# Altium PCB 遥控.PCBDOC (part 2 of 2)
Units mm, origin at the board's own origin, x right, y up, seen from the top; angles counter-clockwise.
Board outline 70.36 x 87.5 mm, 2 copper layers (Top Layer, Bottom Layer); 32 components, 37 nets, 115 pads, 57 vias.
Unrouted connection lines stored in the file: 5.
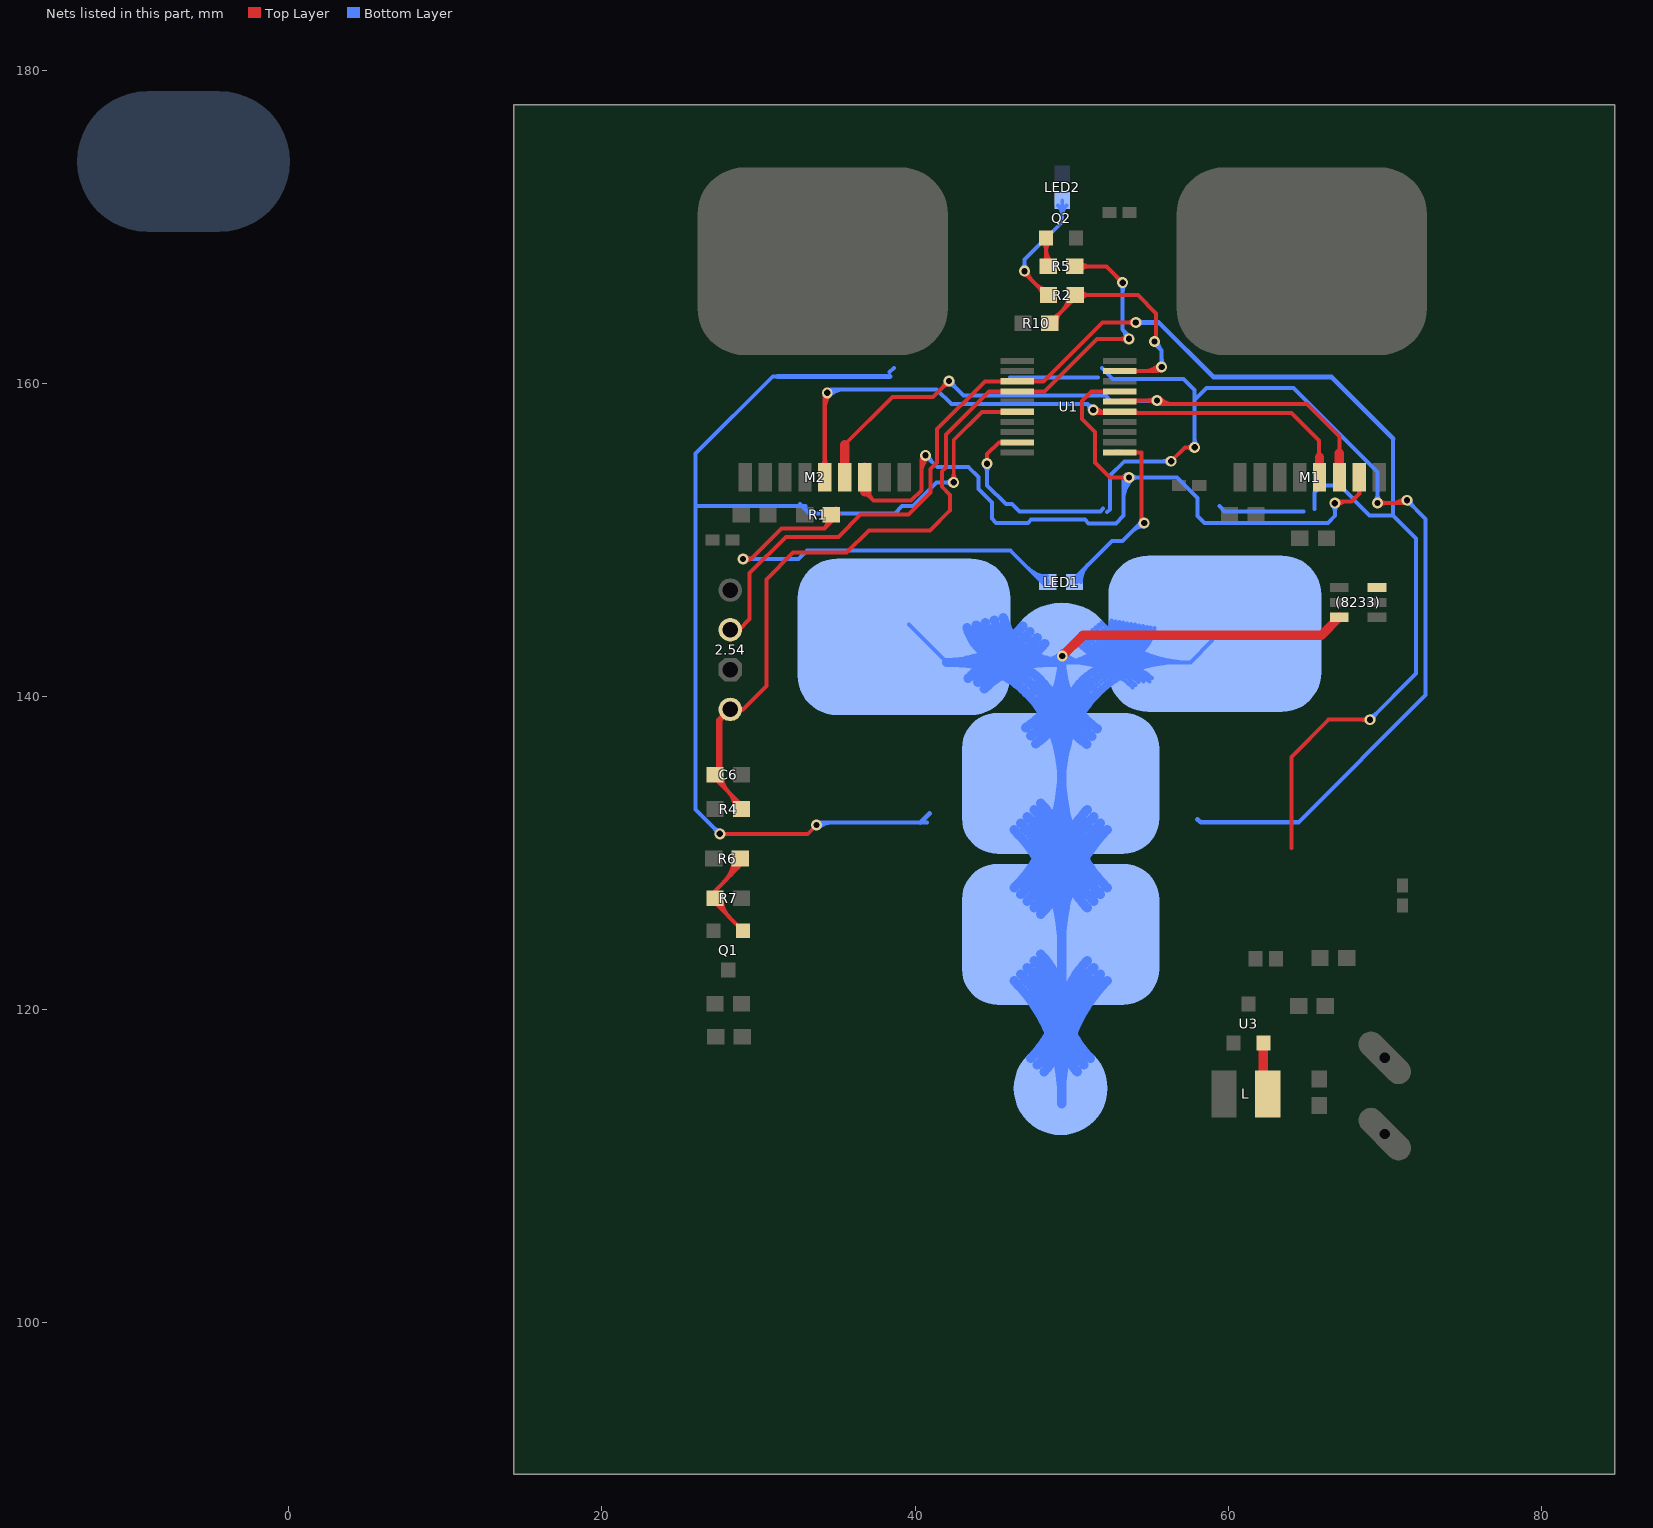
[diagram p2: the nets of this part, all layers, seen from the top]

## Via types
v1: diameter 0.7, hole 0.4, Top Layer to Bottom Layer, 54 vias
v2: diameter 0.82, hole 0.5, Top Layer to Bottom Layer, 3 vias

## Nets (pads, with @x,y where several pads share a name; then routed paths per layer and width w, separated by ;. In a path a pad name is that pad's centre, name@x,y a point inside that pad or via, vN(x,y) a via of type N, cw(c..) or ccw(c..) an arc to the next point about the centre after c; other vN are vias at no path point) (continued)
JD: U1.6 | length 82.9
  Top Layer w0.254: v1(27.534,131.216) 33.147,131.216 v1(33.706,131.775) ; v1@42.311,153.828 ccw(c41.923,154.216) 42.472,154.216 ; v1@42.472,153.67 42.472,156.366 44.282,158.176 U1.6@46.534,158.176 ; 42.472,154.201 ccw(c42.999,154.201) v1@42.626,153.828
  Bottom Layer w0.254: v1@27.311,131.216 ccw(c26.772,131.216) 27.153,131.597 ccw(c27.534,131.978) v1@27.534,131.439 ; v1(27.534,131.216) 25.984,132.766 25.984,152.146 ; 31.217,160.426 30.912,160.426 25.984,155.499 25.984,152.146 ; 32.662,152.273 33.246,151.689 38.71,151.689 39.167,152.146 39.853,152.146 41.377,153.67 v1(42.469,153.67) ; 32.995,152.146 25.984,152.146 ; v1(33.706,131.775) 33.858,131.928 40.767,131.928 ; v1@33.863,131.618 cw(c34.612,130.869) 34.612,131.928 ; 38.379,160.706 38.659,160.985 ; v1@42.311,153.512 ccw(c41.93,153.132) 41.93,153.67 ccw(c41.93,154.208) v1@42.311,153.828
  Bottom Layer w0.3: 31.217,160.426 38.405,160.426 ; 40.335,131.928 40.919,132.512
JE: U1.9 | length 93.6
  Top Layer w0.254: v1(44.602,154.864) 44.602,155.473 45.354,156.225 U1.9@46.534,156.225 ; v1(56.363,155.016) 57.252,155.905 v1(57.861,155.905) ; v1@57.704,155.748 ccw(c57.323,155.367) 57.323,155.905 ccw(c57.323,156.444) v1@57.704,156.063 ; v1(69.545,152.349) 71.247,152.349 v1(71.425,152.527) ; v1@69.703,152.192 cw(c70.084,151.811) 70.084,152.349 cw(c70.084,152.888) v1@69.703,152.507 ; 70.457,152.349 ccw(c70.457,153.495) v1@71.267,152.685 ; 71.07,152.349 ccw(c71.07,152.881) v1@71.447,152.505
  Bottom Layer w0.254: v1@44.445,154.706 cw(c44.064,154.325) 44.602,154.325 cw(c45.141,154.325) v1@44.76,154.706 ; v1(44.602,154.864) 44.602,155.092 44.602,153.467 45.796,152.273 46.203,152.273 46.66,151.816 51.841,151.816 52.019,151.994 ; 46.05,160.376 51.689,160.376 ; 51.943,160.96 52.629,160.274 57.15,160.274 57.861,159.563 v1(57.861,155.905) ; 52.273,151.765 52.451,151.943 52.451,154.102 53.365,155.016 v1(56.363,155.016) ; v1@56.205,154.859 ccw(c55.824,154.478) 55.824,155.016 ccw(c55.824,155.555) v1@56.205,155.174 ; v1@57.704,156.063 ccw(c57.323,156.444) 57.861,156.444 ccw(c58.4,156.444) v1@58.019,156.063 ; 57.861,158.928 58.623,159.69 64.186,159.69 69.545,154.33 v1(69.545,152.349) ; 64.491,131.953 72.619,140.081 72.619,151.333 v1(71.425,152.527) ; v1@69.388,152.507 ccw(c69.007,152.888) 69.545,152.888 ccw(c70.084,152.888) v1@69.703,152.507 ; v1@71.425,152.304 cw(c71.425,151.766) 71.805,152.146 cw(c72.186,152.527) v1@71.648,152.527
  Bottom Layer w0.3: 58.039,132.156 58.242,131.953 64.491,131.953
JF: 
L1: L.2 U3.2 | length 2.9
  Top Layer w0.6: L.2@62.24,114.971 U3.2@62.24,117.901
LED2: LED2.1 R2.1 | length 12
  Top Layer w0.254: v1@46.99,166.934 cw(c46.99,166.641) 47.197,166.849 ; v1(46.99,167.157) 47.066,167.157 47.066,166.98 R2.1@48.247,165.798 ; v1@47.213,167.157 ccw(c47.997,167.157) 47.443,166.603 ; 47.73,166.316 ccw(c48.478,167.064) R2.1@48.478,166.006 ; 47.887,166.159 cw(c47.362,165.633) R2.1@48.105,165.633
  Bottom Layer w0.254: v1@46.832,167.315 ccw(c46.452,167.696) 46.99,167.696 ccw(c47.528,167.696) v1@47.148,167.315 ; v1(46.99,167.157) 46.99,167.899 49.403,170.312 LED2.1@49.403,171.667 ; LED2.1@49.139,171.353 cw(c48.503,170.717) 49.403,170.717 cw(c50.303,170.717) LED2.1@49.667,171.353
MISO: M1.2 M2.2 U1.17 | length 67.8
  Top Layer w0.254: 36.779,153.06 37.338,152.502 ; M2.2@36.822,153.515 ccw(c37.538,153.343) 37.017,152.822 ; M2.2@37.069,153.455 ccw(c38.055,153.219) 37.338,152.502 ; 40.411,154.246 cw(c41.817,154.246) v1@40.823,155.24 ; 40.411,154.859 cw(c41.204,154.859) v1@40.643,155.419 ; v1@40.454,155.326 cw(c40.286,155.269) 40.411,155.143 ; v1@40.594,155.186 ccw(c40.537,155.017) 40.411,155.143 ; v1(40.665,155.397) 40.411,155.143 ; U1.17@53.084,159.476 51.272,159.476 50.653,158.857 50.653,157.73 51.486,156.898 51.486,154.94 52.451,153.975 v1@53.391,153.975 ; v1@53.513,153.817 ccw(c53.132,153.436) 53.132,153.975 ccw(c53.132,154.513) v1@53.513,154.132 ; v1(66.815,152.337) 66.878,152.4 66.827,152.451 67.869,152.451 68.377,152.959 ; v1@66.972,152.179 cw(c67.629,151.522) 67.629,152.451 ; M1.2@68.209,153.281 cw(c67.984,152.959) 68.377,152.959 ; M1.2@68.377,153.772 68.377,152.959 ; M1.2@68.38,154.561 M1.2@68.53,154.711 ; M1.2@68.547,153.278 ccw(c68.762,152.959) 68.377,152.959 ; 37.338,152.502 39.751,152.502 40.411,153.162 40.411,155.143
  Top Layer w0.6: 36.779,153.06 M2.2@36.779,154.635
  Top Layer w0.7: M1.2@68.377,153.772 68.38,153.775 M1.2@68.38,154.561
  Bottom Layer w0.254: v1@40.665,155.174 cw(c40.665,154.636) 41.046,155.017 cw(c41.427,155.397) v1@40.888,155.397 ; v1(40.665,155.397) 41.427,154.635 43.409,154.635 44.044,154 44.044,153.238 44.907,152.375 44.907,151.359 45.183,151.083 47.222,151.083 47.422,151.282 50.851,151.282 51.079,151.054 52.825,151.054 53.315,151.544 53.315,153.975 ; 53.315,152.578 cw(c55.067,152.578) 53.828,153.817 cw(c54.209,153.436) 54.209,153.975 cw(c54.209,154.513) v1@53.828,154.132 ; 53.315,153.191 cw(c54.454,153.191) v1@53.648,153.997 ; 53.315,153.804 cw(c53.841,153.804) v1@53.469,154.176 ; v1@53.469,153.878 ccw(c53.315,153.803) 53.315,153.975 ; v1@53.469,154.072 cw(c53.315,154.147) 53.315,153.975 ; v1@66.657,152.179 cw(c66.246,151.767) 66.827,151.767 ; 66.827,151.829 cw(c67.322,151.829) v1@66.972,152.179 ; v1@66.827,152.553 66.827,151.536 66.367,151.076 58.788,151.076 58.784,151.079 58.491,151.079 58.039,151.531 58.039,152.679 56.744,153.975 53.315,153.975
  other v1: 53.67,153.975
MOSI: M1.3 M2.3 U1.16 | length 49.8
  Top Layer w0.254: 35.509,156.083 38.557,159.131 41.148,159.131 v1(42.164,160.147) ; v1@41.941,160.147 cw(c41.403,160.147) 41.783,159.766 cw(c42.164,159.386) v1@42.164,159.924 ; U1.16@53.084,158.826 53.158,158.9 55.344,158.9 55.57,158.674 65.024,158.674 67.11,156.588 M1.3@67.11,154 ; U1.16@54.012,158.778 cw(c54.307,158.483) 54.307,158.9 ; 54.904,158.9 ccw(c54.904,159.447) v1@55.291,159.06 ; 54.916,158.9 cw(c54.916,158.37) v1@55.291,158.745 ; v1@55.426,158.88 ccw(c55.925,159.379) 55.925,158.674 ; v1@55.606,159.06 ccw(c56.538,159.993) 56.538,158.674 ; M1.3@66.899,154.686 ccw(c66.391,155.194) 67.11,155.194 ccw(c67.829,155.194) M1.3@67.321,154.686 ; M1.3@67.056,154.864 M1.3@67.208,154.711
  Top Layer w0.6: M2.3@35.509,154.559 35.509,156.083 ; M1.3@67.107,153.746 67.107,155.524
  Bottom Layer w0.254: v1@42.024,160.287 43.104,159.207 52.172,159.207 52.502,158.877 v1@55.397,158.877 ; v1@42.164,159.924 cw(c42.164,159.386) 42.545,159.766 cw(c42.925,160.147) v1@42.387,160.147 ; 54.849,158.877 ccw(c54.849,159.502) v1@55.291,159.06 ; 54.971,158.877 cw(c54.971,158.425) v1@55.291,158.745
  other v1: 55.448,158.902
POW+: 
Q1-B: Q1.1 R6.2 R7.2 | length 11.7
  Top Layer w0.254: R7.2@27.386,127.102 ccw(c28.464,127.102) 27.702,126.34 ; R7.2@27.64,127.102 ccw(c29.331,127.102) 28.135,125.906 ; 27.804,128.159 ccw(c26.321,129.642) R6.2@28.418,129.642 ; 28.237,128.593 ccw(c27.188,129.642) R6.2@28.672,129.642 ; 28.671,129.026 ccw(c28.056,129.642) R6.2@28.926,129.642 ; R6.2@28.866,129.642 28.866,129.222 27.217,127.572 27.217,126.824 Q1.1@29.017,125.024
R3: 
R7: 
RST/POW+: 2.54.1 C6.1 Q2.1 R4.2 R5.1 R5.2 U1.4 | length 71.3
  Top Layer w0.254: C6.1@27.076,134.899 R4.2@28.926,133.049 ; C6.1@27.386,135 ccw(c28.376,135) 27.676,134.3 ; C6.1@27.64,135 ccw(c29.243,135) 28.11,133.866 ; 2.54.1@27.711,139.167 29.007,139.167 ; 28.012,133.964 cw(c26.848,132.8) R4.2@28.494,132.8 ; 28.445,133.53 cw(c27.715,132.8) R4.2@28.748,132.8 ; 2.54.1@28.803,139.009 cw(c29.007,138.956) 29.007,139.167 ; 2.54.1@28.803,139.324 ccw(c29.007,139.378) 29.007,139.167 ; Q2.1@48.148,169.032 cw(c47.597,168.481) 48.377,168.481 cw(c49.157,168.481) Q2.1@48.605,169.032 ; R5.1@48.188,167.726 ccw(c47.734,168.181) 48.377,168.181 ; 48.377,168.545 ccw(c49.535,168.545) R5.1@48.716,167.726 ; Q2.1@48.377,169.286 48.377,167.588 R5.1@48.502,167.462 ; R5.2@50.202,167.462 52.222,167.462 v1(53.264,166.421) ; R5.2@50.516,167.198 cw(c51.153,166.562) 51.153,167.462 cw(c51.153,168.363) R5.2@50.516,167.726 ; v1@53.041,166.421 ccw(c52.502,166.421) 52.883,166.801 ccw(c53.264,167.182) v1@53.264,166.644 ; 53.071,162.814 ccw(c53.071,163.439) v1@53.513,162.997 ; 53.193,162.814 cw(c53.193,162.362) v1@53.513,162.682 ; v1@53.67,162.814 51.62,162.814 48.282,159.476 U1.4@46.534,159.476 44.719,159.476 41.964,156.721 41.964,154.613 41.707,154.356 41.707,153.398 42.235,152.87 42.235,151.886 40.945,150.597 37.059,150.597 35.636,149.174 32.214,149.174 30.505,147.465 30.505,140.665 29.007,139.167
  Top Layer w0.4: C6.1@27.5,134.95 27.5,138.467 2.54.1@28.2,139.167
  Bottom Layer w0.254: v1@53.106,166.263 cw(c52.725,165.882) 53.264,165.882 cw(c53.802,165.882) v1@53.421,166.263 ; v1(53.264,166.421) 53.264,163.424 ; v1@53.449,162.87 ccw(c52.801,162.961) 53.264,163.424 ; v1(53.67,162.839) 53.67,163.017 53.264,163.424
SCK: M1.4 M2.4 U1.15 | length 49
  Top Layer w0.254: v1@51.362,158.271 ccw(c51.764,158.673) 51.764,158.104 ; v1(51.384,158.293) 51.573,158.104 54.317,158.104 54.332,158.09 64.059,158.09 65.811,156.337 M1.4@65.811,154 ; v1@51.542,158.45 ccw(c52.377,159.286) U1.15@52.377,158.104 ; 51.868,158.104 ccw(c51.868,158.513) U1.15@52.156,158.224 ; U1.15@54.012,158.224 ccw(c54.301,158.513) 54.301,158.104 ; M1.4@65.629,154.686 ccw(c65.19,155.125) 65.811,155.125 ; M1.4@65.659,154.711 M1.4@65.811,154.864 ; 65.811,155.263 ccw(c66.628,155.263) M1.4@66.051,154.686
  Top Layer w0.3: M2.4@34.045,154.669 ccw(c33.575,155.139) 34.239,155.139 ccw(c34.903,155.139) M2.4@34.434,154.669 ; M2.4@34.239,154.483 34.239,159.233 v1@34.493,159.487 ; 34.239,158.534 cw(c35.242,158.534) v1@34.533,159.244
  Top Layer w0.6: M1.4@65.837,154.102 65.837,155.27
  Bottom Layer w0.254: v1@34.37,159.407 cw(c34.869,158.908) 34.869,159.614 ; v1(34.392,159.385) 34.62,159.614 41.377,159.614 42.316,158.674 51.003,158.674 ; v1@34.549,159.227 cw(c35.482,158.295) 35.482,159.614 ; v1@51.156,158.293 51.156,158.521 51.003,158.674 ; v1@51.161,158.293 ccw(c50.623,158.293) 51.004,158.673 ; v1@51.384,158.516 cw(c51.384,159.054) 51.004,158.673
SWIM/JF: 2.54.3 U1.3 | length 105.4
  Top Layer w0.254: 2.54.3@27.711,144.247 28.753,144.247 29.439,144.932 29.439,147.879 31.75,150.19 35.103,150.19 36.525,151.613 39.58,151.613 40.996,153.028 40.996,154.534 41.402,154.94 41.402,157.074 44.454,160.126 U1.3@46.534,160.126 48.214,160.126 51.968,163.881 v1(54.102,163.881) ; v1@53.944,163.723 ccw(c53.564,163.342) 53.564,163.881 ccw(c53.564,164.419) v1@53.944,164.038 ; 64.034,131.19 64.034,136.119 66.421,138.506 v1(69.063,138.506) ; 64.059,130.301 64.059,131.166 ; v1@68.905,138.349 ccw(c68.524,137.968) 68.524,138.506 ccw(c68.524,139.045) v1@68.905,138.664
  Bottom Layer w0.254: 59.436,152.146 59.76,151.822 64.827,151.822 ; 65.507,151.968 65.507,153.035 65.938,153.467 67.132,153.467 69.037,151.562 70.536,151.562 ; v1(69.063,138.506) 72.009,141.453 72.009,150.089 70.536,151.562 ; v1@69.063,138.729 ccw(c69.063,139.268) 69.443,138.887 ccw(c69.824,138.506) v1@69.286,138.506 ; 70.536,156.464 70.536,151.562
  Bottom Layer w0.3: v1(54.102,163.881) 55.575,163.881 59.055,160.401 66.599,160.401 70.536,156.464 ; v1@54.243,163.739 cw(c54.585,163.398) 54.585,163.881 cw(c54.585,164.364) v1@54.243,164.022
T-LED: R2.2 R10.2 U1.19 | length 23.3
  Top Layer w0.254: R10.2@48.602,163.83 50.228,165.456 R2.2@50.228,165.633 54.229,165.633 55.397,164.465 55.397,162.865 v1@55.194,162.662 ; R10.2@48.652,164.203 ccw(c48.652,164.983) 49.203,164.431 ; R10.2@49.025,163.83 cw(c50.046,163.83) 49.324,164.552 ; 49.38,164.608 ccw(c48.354,165.633) R2.2@49.805,165.633 ; 49.813,165.041 ccw(c49.221,165.633) R2.2@50.059,165.633 ; R2.2@49.93,165.158 cw(c50.178,164.91) R2.2@50.178,165.26 ; R2.2@50.541,165.37 cw(c51.178,164.733) 51.178,165.633 cw(c51.178,166.534) R2.2@50.541,165.897 ; U1.19@53.194,160.776 55.493,160.776 ; 54.587,160.776 ccw(c54.587,162.202) v1@55.595,161.194 ; 55.2,160.776 ccw(c55.2,161.589) v1@55.775,161.014 ; v1@55.54,160.969 cw(c55.357,160.912) 55.493,160.776 ; v1@55.686,160.823 ccw(c55.629,160.64) 55.493,160.776 ; v1(55.753,161.036) 55.493,160.776
  Bottom Layer w0.254: v1@55.194,162.662 55.753,162.103 v1(55.753,161.036) ; v1@55.296,162.439 cw(c55.296,162.146) 55.503,162.353 ; v1@55.519,162.662 ccw(c56.302,162.662) 55.748,162.107 ; v1@55.595,161.194 ccw(c55.215,161.574) 55.753,161.574 ccw(c56.291,161.574) v1@55.911,161.194
  other v1: 55.296,162.662
TCH: (8233).3 pad.0@39.3,143.8 pad.0@49.3,114.97 pad.0@49.3,124.8 pad.0@49.3,134.442 pad.0@49.378,142.5 pad.0@59.15,144 | length 599.8
  Top Layer w0.6: v1(49.403,142.57) 50.724,143.891 65.942,143.891 67.101,145.05
  Bottom Layer w0.254: pad.0@39.6,144.6 pad.0@42.036,142.164 ; pad.0@49.201,142.369 ccw(c49.696,142.863) pad.0@49.696,142.164 ; pad.0@49.26,142.399 cw(c49.063,142.163) 49.371,142.163 cw(c49.601,142.163) pad.0@49.501,142.37 ; pad.0@49.371,142.9 pad.0@49.371,142.164 ; pad.0@49.381,142.548 ccw(c50.309,143.476) pad.0@50.309,142.164 ; pad.0@49.561,142.728 ccw(c50.923,144.09) pad.0@50.923,142.164 ; pad.0@49.673,142.164 ccw(c49.673,145.337) pad.0@52.8,144.793 ; pad.0@49.975,142.164 ccw(c49.975,145.284) pad.0@53.05,144.749 ; pad.0@50.019,142.164 cw(c50.019,136.669) pad.0@53.904,140.554 ; pad.0@50.277,142.164 ccw(c50.277,145.232) pad.0@53.3,144.705 ; pad.0@50.384,143.386 ccw(c53.087,145.764) pad.0@53.087,142.164 ; pad.0@50.575,143.554 ccw(c53.649,146.258) pad.0@53.649,142.164 ; pad.0@50.58,142.164 ccw(c50.58,145.179) pad.0@53.55,144.662 ; pad.0@50.632,142.164 cw(c50.632,137.282) pad.0@54.084,140.734 ; pad.0@50.685,141.193 cw(c53.03,138.848) pad.0@53.03,142.164 ; pad.0@50.766,143.721 ccw(c54.211,146.752) pad.0@54.211,142.164 ; pad.0@50.865,141.013 cw(c53.643,138.235) pad.0@53.643,142.164 ; pad.0@50.882,142.164 ccw(c50.882,145.127) pad.0@53.8,144.618 ; pad.0@50.957,143.889 ccw(c54.772,147.246) pad.0@54.772,142.164 ; pad.0@51.044,140.833 cw(c54.256,137.621) pad.0@54.256,142.164 ; pad.0@51.147,144.057 ccw(c55.334,147.741) pad.0@55.334,142.164 ; pad.0@51.184,142.164 ccw(c51.184,145.074) pad.0@54.051,144.575 ; pad.0@51.224,140.654 cw(c54.869,137.008) pad.0@54.869,142.164 ; pad.0@51.245,142.164 cw(c51.245,137.895) pad.0@54.263,140.913 ; pad.0@51.338,144.225 ccw(c55.896,148.235) pad.0@55.896,142.164 ; pad.0@51.403,140.474 cw(c55.483,136.395) pad.0@55.483,142.164 ; pad.0@51.486,142.164 ccw(c51.486,145.021) pad.0@54.301,144.531 ; pad.0@51.529,144.392 ccw(c56.458,148.729) pad.0@56.458,142.164 ; pad.0@51.558,141.835 ccw(c50.94,144.602) pad.0@53.763,144.337 ; pad.0@51.583,140.295 cw(c56.096,135.782) pad.0@56.096,142.164 ; pad.0@51.611,141.619 ccw(c50.953,144.073) pad.0@53.493,144.044 ; pad.0@51.677,141.637 cw(c52.496,138.579) pad.0@54.608,140.937 ; pad.0@51.719,144.56 ccw(c57.02,149.223) pad.0@57.02,142.164 ; pad.0@51.763,140.115 cw(c56.709,135.169) pad.0@56.709,142.164 ; pad.0@51.788,142.164 ccw(c51.788,144.969) pad.0@54.551,144.487 ; pad.0@51.794,141.888 cw(c52.535,138.568) pad.0@54.792,141.114 ; pad.0@51.858,142.164 cw(c51.858,138.508) pad.0@54.443,141.093 ; pad.0@51.899,141.911 ccw(c51.306,144.568) pad.0@54.016,144.313 ; pad.0@51.91,144.728 ccw(c57.581,149.718) pad.0@57.581,142.164 ; pad.0@51.931,141.541 ccw(c51.297,143.908) pad.0@53.747,143.945 ; pad.0@51.934,141.706 ccw(c51.301,144.069) pad.0@53.747,144.041 ; pad.0@52.09,142.164 ccw(c52.09,144.916) pad.0@54.801,144.444 ; pad.0@52.13,141.758 cw(c52.87,138.997) pad.0@54.777,141.127 ; pad.0@52.237,141.459 ccw(c51.62,143.763) pad.0@54.004,143.862 ; pad.0@52.24,141.987 ccw(c51.671,144.533) pad.0@54.269,144.289 ; pad.0@52.245,141.625 cw(c53,138.807) pad.0@54.873,141.043 ; pad.0@52.246,141.625 ccw(c51.633,143.913) pad.0@54.001,143.949 ; pad.0@52.258,141.793 ccw(c51.649,144.065) pad.0@54.001,144.038 ; pad.0@52.279,141.996 cw(c52.942,139.027) pad.0@54.96,141.304 ; pad.0@52.366,141.493 cw(c53.137,138.613) pad.0@54.974,140.962 ; pad.0@52.392,142.164 ccw(c52.392,144.864) pad.0@55.052,144.4 ; pad.0@52.471,142.164 cw(c52.471,139.121) pad.0@54.623,141.273 ; pad.0@52.544,141.541 ccw(c51.944,143.777) pad.0@54.258,143.872 ; pad.0@52.549,144.836 cw(c49.371,145.39) pad.0@49.371,142.164 ; pad.0@52.561,141.71 ccw(c51.969,143.918) pad.0@54.255,143.953 ; pad.0@52.581,142.064 ccw(c52.037,144.499) pad.0@54.521,144.266 ; pad.0@52.581,141.879 ccw(c51.997,144.061) pad.0@54.255,144.035 ; pad.0@52.583,141.88 cw(c53.244,139.415) pad.0@54.946,141.316 ; pad.0@52.694,142.164 ccw(c52.694,144.811) pad.0@55.302,144.357 ; pad.0@52.717,141.751 cw(c53.383,139.264) pad.0@55.036,141.238 ; pad.0@52.85,141.623 ccw(c52.269,143.79) pad.0@54.511,143.883 ; pad.0@52.858,141.625 cw(c53.53,139.115) pad.0@55.13,141.162 ; pad.0@58.979,143.561 pad.0@57.582,142.164 ; pad.0@49.371,142.164 pad.0@57.582,142.164
  Bottom Layer w0.6: pad.0@42.036,142.164 pad.0@49.371,142.164 ; pad.0@42.036,142.164 ccw(c42.036,148.352) pad.0@46.875,144.495 ; pad.0@42.464,142.164 cw(c42.464,135.586) 47.115,140.237 cw(c41.668,134.79) pad.0@49.371,134.79 ; pad.0@43.282,142.164 ccw(c43.282,147.359) pad.0@47.345,144.121 ; pad.0@43.321,144.399 ccw(c46.238,145.185) pad.0@46.238,142.164 ; pad.0@43.386,141.149 cw(c45.052,139.217) pad.0@45.712,141.682 ; pad.0@43.587,141.338 cw(c45.359,139.584) pad.0@46.004,141.992 ; pad.0@43.9,144.555 ccw(c47.021,145.396) pad.0@47.021,142.164 ; pad.0@43.912,142.164 cw(c43.912,137.035) 47.539,140.662 cw(c43.117,136.239) pad.0@49.371,136.239 ; pad.0@43.999,140.901 cw(c47.048,137.852) pad.0@47.048,142.164 ; pad.0@44.014,140.915 cw(c46.204,138.747) pad.0@47.002,141.724 ; pad.0@44.423,140.477 cw(c48.497,136.403) pad.0@48.497,142.164 ; pad.0@44.479,144.711 ccw(c47.804,145.608) pad.0@47.804,142.164 ; pad.0@44.528,142.164 ccw(c44.528,146.366) pad.0@47.814,143.747 ; pad.0@44.591,144.05 ccw(c46.996,144.222) pad.0@46.372,141.893 ; pad.0@44.6,143.816 ccw(c47.008,143.828) pad.0@46.385,141.501 ; pad.0@45.059,144.867 ccw(c48.588,145.819) pad.0@48.588,142.164 ; pad.0@45.19,144.093 ccw(c47.886,144.286) pad.0@47.186,141.675 ; pad.0@45.361,142.164 cw(c45.361,138.483) 47.963,141.086 cw(c44.565,137.687) pad.0@49.371,137.687 ; pad.0@45.638,145.023 ccw(c49.371,146.03) pad.0@49.371,142.164 ; pad.0@45.773,142.164 ccw(c45.773,145.373) pad.0@48.283,143.373 ; pad.0@46.33,121.83 cw(c38.989,114.489) pad.0@49.371,114.489 ; pad.0@46.33,127.77 ccw(c38.989,135.111) pad.0@49.371,135.111 ; pad.0@46.33,131.472 cw(c38.989,124.131) pad.0@49.371,124.131 ; pad.0@46.754,122.254 cw(c40.437,115.937) pad.0@49.371,115.937 ; pad.0@46.754,127.346 ccw(c40.437,133.663) pad.0@49.371,133.663 ; pad.0@46.754,131.897 cw(c40.437,125.58) pad.0@49.371,125.58 ; pad.0@47.068,138 ccw(c44.456,142.163) pad.0@49.371,142.163 ; pad.0@47.179,122.679 cw(c41.886,117.386) pad.0@49.371,117.386 ; pad.0@47.179,126.921 ccw(c41.886,132.214) pad.0@49.371,132.214 ; pad.0@47.179,132.321 cw(c41.886,127.028) pad.0@49.371,127.028 ; pad.0@47.387,137.492 ccw(c45.137,141.079) pad.0@49.371,141.079 ; pad.0@47.391,116.879 ccw(c42.61,121.66) pad.0@49.371,121.66 ; pad.0@47.603,123.103 cw(c43.334,118.834) 49.371,118.834 ; pad.0@47.603,126.497 ccw(c43.334,130.766) pad.0@49.371,130.766 ; pad.0@47.603,132.745 cw(c43.334,128.477) pad.0@49.371,128.477 ; pad.0@47.706,136.984 ccw(c45.817,139.994) pad.0@49.371,139.994 ; pad.0@47.815,116.455 ccw(c44.059,120.211) 49.371,120.211 ; pad.0@48.027,123.527 cw(c44.783,120.283) 49.371,120.283 ; pad.0@48.027,126.073 ccw(c44.783,129.317) 49.371,129.317 ; pad.0@48.027,133.169 cw(c44.783,129.925) 49.371,129.925 ; pad.0@48.239,116.031 ccw(c45.507,118.763) 49.371,118.763 ; pad.0@48.301,142.164 ccw(c48.301,143.672) pad.0@49.368,142.606 ; pad.0@48.961,120.614 cw(c48.896,119.816) 49.676,119.996 ; 48.998,120.11 cw(c49.634,119.957) pad.0@49.589,120.61 ; pad.0@49.052,128.993 ccw(c49.024,129.463) 49.486,129.366 ; pad.0@49.371,113.97 pad.0@49.371,142.164 ; pad.0@49.371,114.832 cw(c59.268,114.832) pad.0@52.27,121.83 ; pad.0@49.371,116.28 cw(c57.82,116.28) pad.0@51.846,122.254 ; pad.0@49.371,117.729 cw(c56.371,117.729) pad.0@51.421,122.679 ; 49.371,118.42 ccw(c52.75,118.42) pad.0@50.361,116.031 ; 49.371,119.177 cw(c54.923,119.177) pad.0@50.997,123.103 ; 49.371,119.869 ccw(c54.198,119.869) pad.0@50.785,116.455 ; pad.0@49.371,121.317 ccw(c55.647,121.317) pad.0@51.209,116.879 ; pad.0@49.371,124.474 cw(c59.268,124.474) pad.0@52.27,131.472 ; pad.0@49.371,125.922 cw(c57.82,125.922) pad.0@51.846,131.897 ; pad.0@49.371,127.371 cw(c56.371,127.371) pad.0@51.421,132.321 ; pad.0@49.371,128.819 cw(c54.923,128.819) pad.0@50.997,132.745 ; pad.0@49.371,130.423 ccw(c54.923,130.423) pad.0@50.997,126.497 ; pad.0@49.371,131.871 ccw(c56.371,131.871) pad.0@51.421,126.921 ; pad.0@49.371,133.32 ccw(c57.82,133.32) pad.0@51.846,127.346 ; pad.0@49.371,134.759 cw(c57.119,134.759) pad.0@51.64,140.237 ; pad.0@49.371,134.768 ccw(c59.268,134.768) pad.0@52.27,127.77 ; pad.0@49.371,136.207 cw(c55.67,136.207) pad.0@51.216,140.662 ; pad.0@49.371,137.656 cw(c54.222,137.656) pad.0@50.792,141.086 ; pad.0@49.371,139.919 ccw(c52.957,139.919) pad.0@50.966,136.937 ; pad.0@49.371,141.041 ccw(c53.706,141.041) pad.0@51.299,137.436 ; pad.0@51.632,137.935 cw(c54.455,142.163) pad.0@49.371,142.163
TOG: (8233).6
XY3V: LED1.2 R1.1 | length 33.5
  Top Layer w0.254: v1@29.007,148.793 29.54,148.793 ; v1@29.164,148.925 ccw(c29.484,149.245) 29.484,148.793 ; v1@29.177,148.624 cw(c29.54,148.319) 29.54,148.793 ; R1.1@34.285,151.4 cw(c33.821,151.107) 34.209,150.719 ; 34.434,150.943 ccw(c34.096,151.281) R1.1@34.499,151.536 ; R1.1@34.937,152 34.937,151.829 35.128,151.638 34.209,150.719 ; 29.54,148.793 31.466,150.719 34.209,150.719
  Bottom Layer w0.254: v1(29.007,148.768) 32.563,148.768 33.096,149.301 46.109,149.301 48.294,147.117 LED1.2@48.477,147.3 ; v1@29.164,148.61 cw(c29.545,148.229) 29.545,148.768 cw(c29.545,149.306) v1@29.164,148.925 ; 47.25,148.16 ccw(c48.427,149.337) LED1.2@48.427,147.673 ; 47.684,147.727 ccw(c48.427,148.47) LED1.2@48.427,147.419
Z-LED: LED1.1 U1.11 | length 15.7
  Top Layer w0.254: U1.11@52.73,155.626 53.137,155.626 53.188,155.575 54.458,155.575 v1@54.458,151.079
  Bottom Layer w0.254: LED1.1@50.177,147.3 50.177,147.535 52.567,149.925 53.252,149.925 54.407,151.079 v1(54.635,151.079) ; LED1.1@50.346,147.3 cw(c51.321,147.3) 50.631,147.99 ; LED1.1@50.6,147.3 cw(c52.188,147.3) 51.065,148.423 ; 53.864,150.537 cw(c54.635,149.766) v1@54.635,150.856 ; 54.298,150.97 cw(c54.635,150.633) v1@54.635,151.11

## Polygon pours and split planes (outlines as drawn)
GND on Top Layer "Top Layer-No Net" (none, remove dead copper, pour order 5): 25.679,160.503 25.634,160.54 25.634,161.063 25.634,161.125 26.574,161.892 26.904,162.161 27.582,162.161 71.719,162.161 71.77,162.203 72.7,162.203 72.7,162.058 73.513,161.394 73.688,161.252 73.688,160.605 73.688,115.821 73.335,115.533 71.76,114.247 71.76,114.061 67.544,114.061 67.265,114.289 66.528,113.688 66.528,108.152 27.343,108.152 27.293,108.193 26.853,108.193 26.675,108.193 26.015,108.732 25.688,109 25.688,109.54 25.688,160.455 25.679,160.461
GND on Bottom Layer "Top Layer-No Net" (solid, remove dead copper, pour order 6): 58.014,111.56 58.04,111.531 66.827,111.531 66.827,121.253 66.801,121.281 66.775,121.31 58.04,121.31

## Keep-outs
Keep-Out Layer:
  lines w0.1: 25.392,172.288 cw(c27.361,172.352) 27.297,174.32 71.435,174.32 cw(c71.435,172.35) 73.403,172.414 73.403,110.084 ; 25.395,172.288 25.403,109.854 ccw(c27.158,109.91) 27.144,108.154 ; 27.058,108.154 71.501,108.154 ; 67.31,114.783 67.311,116.223 ; 71.498,108.154 ccw(c71.435,110.122) 73.403,110.186

## Other copper
Top Layer:
  region net SWIM/JF: 64.921,129.286 64.921,130.683 63.502,130.683 63.502,129.286
  region net JC: 68.627,129.337 68.627,130.734 67.208,130.734 67.208,129.337
  region net JC: 68.653,135.23 68.653,136.627 67.234,136.627 67.234,135.23
  region net SWIM/JF: 64.922,135.204 64.922,136.601 63.503,136.601 63.503,135.204
Bottom Layer:
  rectangle net JB: 32.131,155.17 33.528,156.589
  rectangle net JB: 37.998,155.172 39.395,156.591
  rectangle net JC: 57.048,135.485 58.445,136.904
  rectangle net JC: 62.89,135.485 64.287,136.904
  rectangle net JE: 62.967,131.775 64.364,133.194
  rectangle net JE: 57.099,131.777 58.496,133.196
  rectangle net JC: 34.138,135.462 35.535,136.881
  rectangle net JC: 40.005,135.46 41.402,136.879
  rectangle net JD: 40.056,131.775 41.453,133.194
  rectangle net JD: 34.188,131.777 35.585,133.196
  rectangle net JA: 58.547,163.933 59.944,165.352
  rectangle net JA: 64.44,163.932 65.837,165.351
  rectangle net SWIM/JF: 64.465,160.201 65.862,161.62
  rectangle net SWIM/JF: 58.598,160.227 59.995,161.646
  rectangle net JB: 58.572,155.17 59.969,156.589
  rectangle net JB: 64.465,155.147 65.862,156.566
  rectangle net SWIM/JF: 64.491,151.46 65.888,152.879
  rectangle net SWIM/JF: 58.649,151.46 60.046,152.879
  rectangle net JB: 51.232,155.147 52.629,156.566
  rectangle net JE: 51.257,151.46 52.654,152.879
  rectangle net JA: 45.339,163.935 46.736,165.354
  rectangle net JA: 51.232,163.935 52.629,165.354
  rectangle net JD: 32.131,160.225 33.528,161.644
  rectangle net JA: 37.973,163.932 39.37,165.351
  rectangle net JA: 32.106,163.933 33.503,165.352
  rectangle net JD: 37.998,160.223 39.395,161.642
  rectangle net JD: 37.998,151.464 39.395,152.883
  rectangle net JE: 45.39,151.464 46.787,152.883
  rectangle net JB: 45.314,155.147 46.711,156.566
  rectangle net JE: 45.415,160.227 46.812,161.646
  rectangle net JD: 32.131,151.464 33.528,152.883
  rectangle net JE: 51.257,160.227 52.654,161.646

## Silkscreen, mask and mechanical layers (free items; w line width, h text height)
Top Overlay:
  lines w0.127: 27.559,157.201 27.559,172.568 ; 39.599,157.124 39.599,172.568 ; 59.055,156.947 59.055,172.568 ; 71.323,156.87 71.323,172.568
  lines w0.254: 65.354,132.969 66.777,132.969 ; 66.065,132.207 66.065,133.68
  lines w0.3: 28.804,160.02 28.804,172.568 ; 40.869,157.505 40.869,172.568
  text "SI24R1" at 62.713,164.592 h1
  text "NRF24RL01" at 30.277,163.855 h1
  text "MOS" at 35.128,159.004 h0.8 r270
  text "CSN" at 32.614,158.928 h0.8 r270
  text "SCK" at 33.934,158.877 h0.8 r270
  text "IRQ" at 37.668,158.801 h0.8 r270
  text "MIS" at 36.398,158.775 h0.8 r270
  text "3V" at 29.997,158.318 h0.8 r270
  text "CE" at 31.191,158.293 h0.8 r270
  text "GND" at 29.54,157.378 h0.8 r90
  text "CE" at 63.602,156.82 h0.8 r90
  text "MOSI" at 67.386,156.794 h0.8 r90
  text "GND" at 62.357,156.743 h0.8 r90
  text "SCK" at 66.167,156.743 h0.8 r90
  text "MISO" at 68.783,156.743 h0.8 r90
  text "IRQ" at 69.977,156.743 h0.8 r90
  text "CSN" at 64.948,156.718 h0.8 r90
  text "3V" at 61.062,156.642 h0.8 r90
  text "GND" at 40.767,156.185 h0.8 r270
  text "J9(DM)" at 63.576,127.432 h1
  text "-" at 70.917,117.5 h2.6
  text "(S38Y)" at 52.959,117.45 h1
  text "(2R2)" at 53.442,111.658 h1
  text "20190922CCHF" at 27.661,111.277 h1.2
  text "CKCS3015" at 50.521,110.058 h1
  text "3V" at 65.202,108.991 h1.6
  text "+" at 68.656,108.407 h2.6
Bottom Overlay:
  lines w0.254: 31.318,159.893 40.157,159.893 40.157,165.887 31.318,165.887 31.318,159.893 ; 31.521,151.028 40.361,151.028 40.361,157.023 31.521,157.023 31.521,151.028 ; 33.325,131.318 33.325,137.312 42.164,137.312 42.164,131.318 33.325,131.318 ; 44.552,159.842 53.391,159.842 53.391,165.837 44.552,165.837 44.552,159.842 ; 44.577,151.079 53.416,151.079 53.416,157.074 44.577,157.074 44.577,151.079 ; 56.363,131.369 65.202,131.369 65.202,137.363 56.363,137.363 56.363,131.369 ; 57.76,159.868 66.599,159.868 66.599,165.862 57.76,165.862 57.76,159.868 ; 57.836,151.028 66.675,151.028 66.675,157.023 57.836,157.023 57.836,151.028
  text "POW" at 50.038,166.675 h1
  text "(J3)Y30" at 38.76,166.649 h1
  text "(J1)AM" at 64.745,166.548 h1
  text "(J5) 60%" at 52.629,149.454 h1
  text "(J4) 30%" at 66.065,149.301 h1
  text "(J6) 100%" at 39.929,149.073 h1
  text "(J7) <Z" at 64.516,129.438 h1
  text "(J8) Y>" at 40.97,129.311 h1
  text "3V+" at 67.793,109.779 h1.6
Top Solder:
  region: 68.627,129.337 68.627,130.734 67.208,130.734 67.208,129.337
  region: 68.656,135.23 68.656,136.627 67.237,136.627 67.237,135.23
  region: 64.922,135.204 64.922,136.601 63.503,136.601 63.503,135.204
  region: 64.921,129.311 64.921,130.708 63.502,130.708 63.502,129.311
Bottom Solder:
  rectangle: 32.131,155.17 33.528,156.589
  rectangle: 37.998,155.172 39.395,156.591
  rectangle: 57.048,135.485 58.445,136.904
  rectangle: 62.89,135.485 64.287,136.904
  rectangle: 62.967,131.775 64.364,133.194
  rectangle: 57.099,131.777 58.496,133.196
  rectangle: 34.138,135.462 35.535,136.881
  rectangle: 40.005,135.46 41.402,136.879
  rectangle: 40.056,131.775 41.453,133.194
  rectangle: 34.188,131.777 35.585,133.196
  rectangle: 32.106,163.933 33.503,165.352
  rectangle: 58.547,163.933 59.944,165.352
  rectangle: 64.44,163.932 65.837,165.351
  rectangle: 64.465,160.201 65.862,161.62
  rectangle: 58.598,160.227 59.995,161.646
  rectangle: 58.572,155.17 59.969,156.589
  rectangle: 64.465,155.147 65.862,156.566
  rectangle: 64.491,151.46 65.888,152.879
  rectangle: 58.649,151.46 60.046,152.879
  rectangle: 51.232,155.147 52.629,156.566
  rectangle: 51.257,151.46 52.654,152.879
  rectangle: 45.339,163.935 46.736,165.354
  rectangle: 51.232,163.935 52.629,165.354
  rectangle: 32.131,160.225 33.528,161.644
  rectangle: 37.973,163.932 39.37,165.351
  rectangle: 37.998,160.223 39.395,161.642
  rectangle: 37.998,151.464 39.395,152.883
  rectangle: 45.39,151.464 46.787,152.883
  rectangle: 45.314,155.147 46.711,156.566
  rectangle: 45.415,160.227 46.812,161.646
  rectangle: 32.131,151.464 33.528,152.883
  rectangle: 51.257,160.227 52.654,161.646